# Altium PCB PCB1.PcbDoc
Units mm, origin at the board's own origin, x right, y up, seen from the top; angles counter-clockwise.
Board outline 150 x 82 mm, 2 copper layers (Top Layer, Bottom Layer); 127 components, 120 nets, 414 pads, 14 vias.
Unrouted connection lines stored in the file: 5.
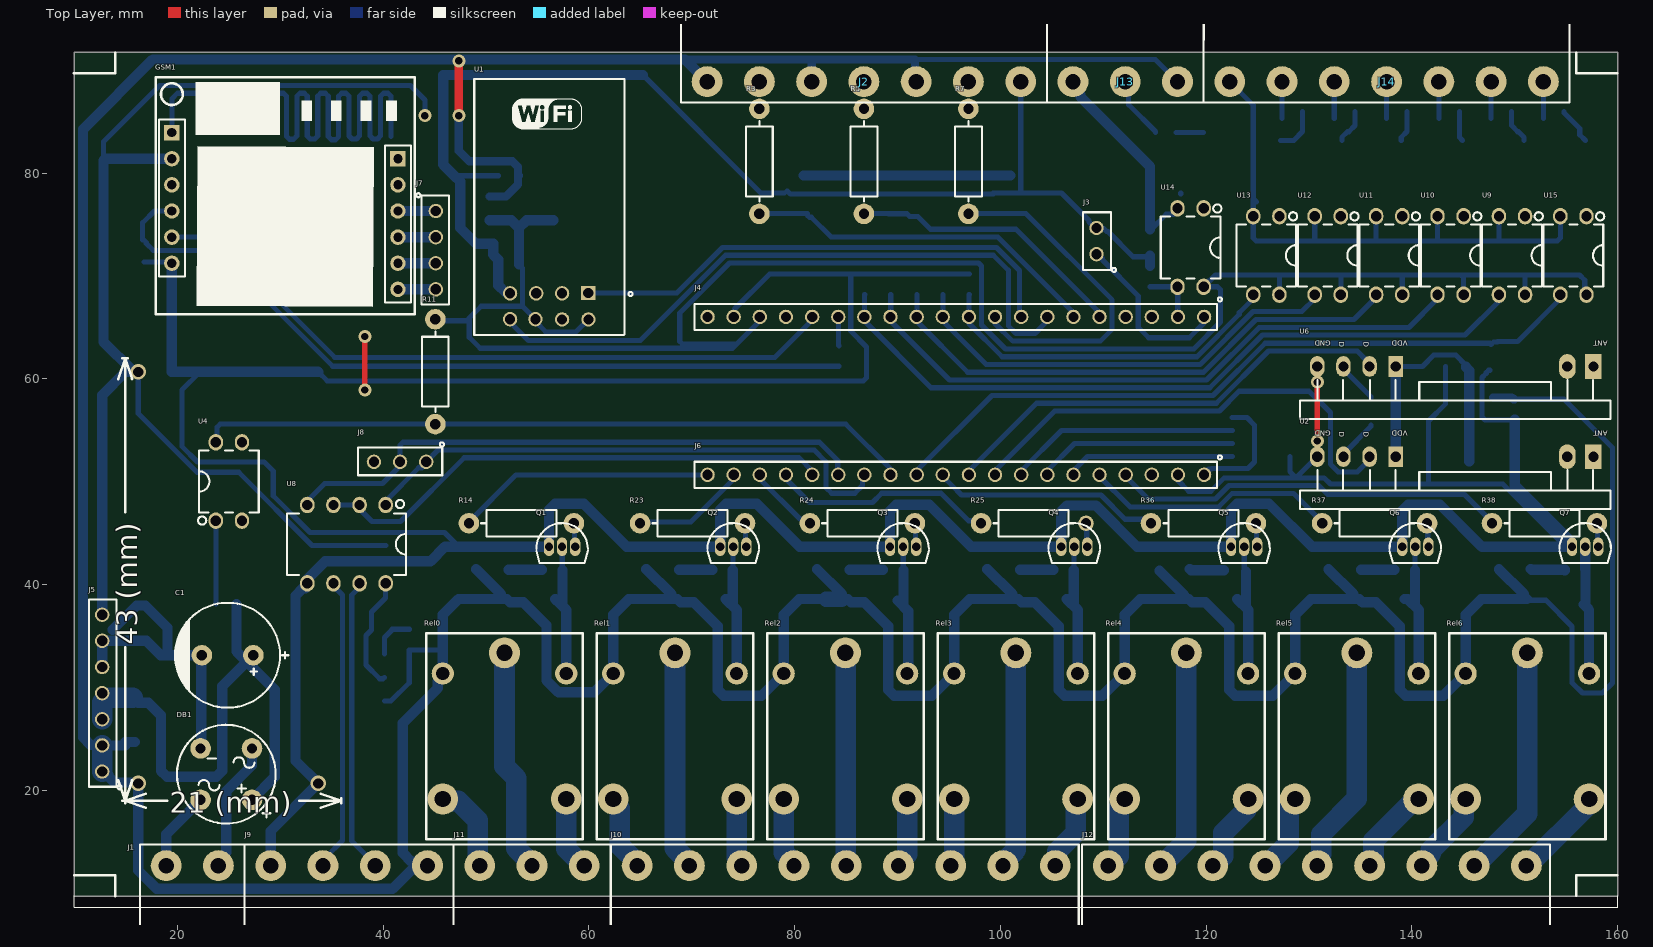
[diagram p0: Top Layer view]
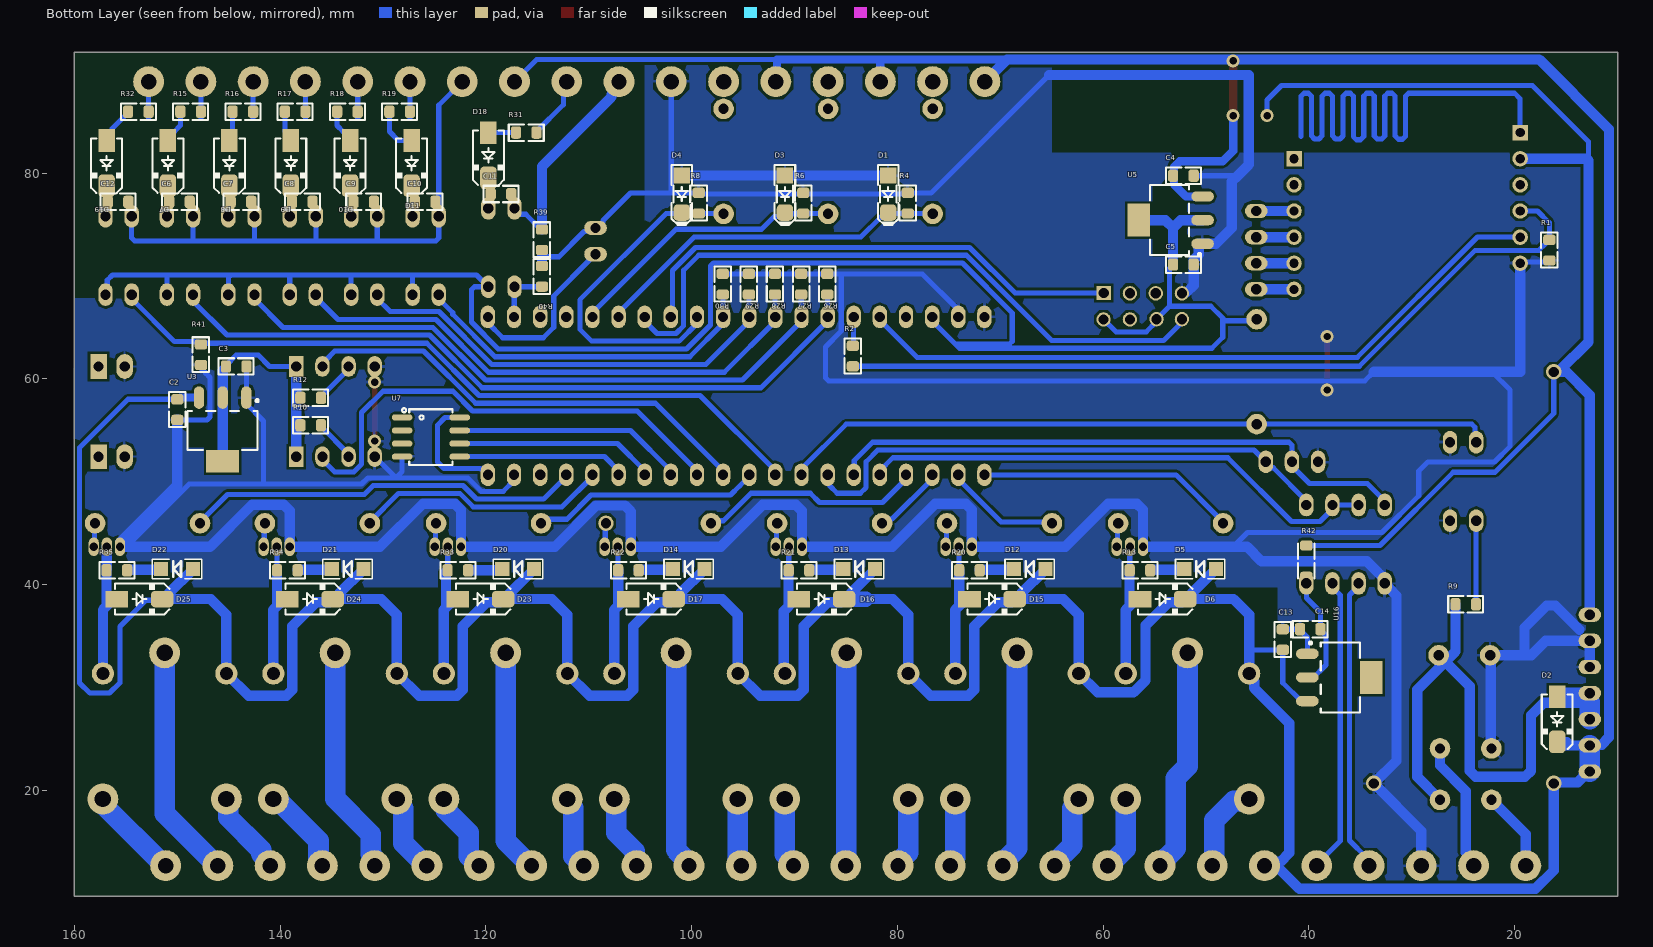
[diagram p1: Bottom Layer view, seen from below]

## Layer stack, top to bottom
Top Solder: solder mask 0.0102, Solder Resist, Dk 3.5
Top Layer: signal copper 0.0356
Dielectric 1: dielectric 0.32, FR-4, Dk 4.8
Bottom Layer: signal copper 0.0356
Bottom Solder: solder mask 0.0102, Solder Resist, Dk 3.5

## Board outline
10,9.744 160,9.744 160,91.744 10,91.744

## Design rules (kind name [scope] priority, off if disabled: settings)
Clearance [All] p1: gap=0.254 ignorepadtopadclearanceinfootprint=FALSE except(0: Arc-Hole Track-Hole SMDPad-Hole THPad-Hole Via-Hole Fill-Hole Poly-Hole Region-Hole Text-Hole)
DiffPairsRouting [All] p1: maxlimit=1 minlimit=0.4 mostfreqgap=0.4 toplayer_minwidth=0.4 toplayer_maxwidth=2 toplayer_prefwidth=0.4 bottomlayer_minwidth=0.4 bottomlayer_maxwidth=2 bottomlayer_prefwidth=0.4 maxuncoupledlength=12.7
PolygonConnect [All] p1: connectstyle=Relief reliefconductorwidth=0.254 reliefentries=4 polygonreliefangle="90 Angle" airgapwidth=0.254
RoutingVias [All] p1: holewidth=0.711 width=1.27 viastyle="Through Hole" minholewidth=0.711 minwidth=1.27 maxholewidth=0.711 maxwidth=1.27
SolderMaskExpansion [All] p1: expansion=0.102 istentingtop=FALSE
Width [All] p1: maxlimit=2 minlimit=0.3 preferedwidth=0.5
29 further rules are at their usual default settings.

## Components (designator, comment, footprint, x,y, rotation, side; value= is the part's Value field where it differs from the comment)
C1 "470uF" C_EL_10X16 24.892,33.147 r180 top
C2 "22uF" C0805 149.987,57.023 r90 bottom
C3 "22uF" C0805 144.272,61.214 r0 bottom
C4 "22uF" C0805 52.208,79.756 r0 bottom
C5 "22uF" C0805 52.208,71.12 r0 bottom
C6 "22uF" C0805 149.783,77.216 r180 bottom
C7 "22uF" C0805 143.814,77.216 r180 bottom
C8 "22uF" C0805 137.845,77.216 r180 bottom
C9 "22uF" C0805 131.876,77.216 r180 bottom
C10 "22uF" C0805 125.907,77.216 r180 bottom
C11 "22uF" C0805 118.541,77.978 r180 bottom
C12 "22uF" C0805 155.752,77.216 r180 bottom
C13 "22uF" C0805 42.545,34.671 r270 bottom
C14 "22uF" C0805 39.878,35.687 r180 bottom
D1 "Z3.0" D_SOD80 80.899,77.978 r270 bottom
D2 "1N4007" D_SMA 15.875,26.924 r270 bottom
D3 "Z3.0" D_SOD80 90.932,77.978 r270 bottom
D4 "Z3.0" D_SOD80 100.965,77.978 r270 bottom
D5 "" "0805 LED" 50.571,41.529 r0 bottom
D6 "1N4007" D_SMA 54.229,38.608 r180 bottom
D7 "1N4007" D_SMA 150.903,80.985 r270 bottom
D8 "1N4007" D_SMA 144.934,80.985 r270 bottom
D9 "1N4007" D_SMA 138.965,80.985 r270 bottom
D10 "1N4007" D_SMA 133.196,80.985 r270 bottom
D11 "1N4007" D_SMA 127.227,80.985 r270 bottom
D12 "" "0805 LED" 67.145,41.529 r0 bottom
D13 "" "0805 LED" 83.718,41.529 r0 bottom
D14 "" "0805 LED" 100.292,41.529 r0 bottom
D15 "1N4007" D_SMA 70.802,38.608 r180 bottom
D16 "1N4007" D_SMA 87.376,38.608 r180 bottom
D17 "1N4007" D_SMA 103.95,38.608 r180 bottom
D18 "1N4007" D_SMA 119.761,81.747 r270 bottom
D19 "1N4007" D_SMA 156.872,80.985 r270 bottom
D20 "" "0805 LED" 116.865,41.529 r0 bottom
D21 "" "0805 LED" 133.439,41.529 r0 bottom
D22 "" "0805 LED" 150.012,41.529 r0 bottom
D23 "1N4007" D_SMA 120.523,38.608 r180 bottom
D24 "1N4007" D_SMA 137.096,38.608 r180 bottom
D25 "1N4007" D_SMA 153.67,38.608 r180 bottom
DB1 "BR-WOB" DBRG_C10 24.765,21.59 r180 top
GSM1 "Sim800L" Sim800L 17.876,89.052 r0 top
J1 "CONN_TB2" MSTB_2 21.463,12.7 r180 top
J2 "CONN_TB7" MSTB_7 86.741,88.9 r0 top
J3 "HDRF2" HDR_F_1X2 109.347,73.406 r90 top
J4 "HDRF20" HDR_F_1X20 95.676,66.032 r180 top
J5 "HDRF7" HDR_F_1X7 12.7,29.464 r90 top
J6 "HDRF20" HDR_F_1X20 95.676,50.682 r180 top
J7 "HDRF4" HDR_F_1X4 45.13,72.517 r270 top
J8 "HDRF3" HDR_F_1X3 41.656,51.943 r180 top
J9 "CONN_TB4" MSTB_4 36.703,12.7 r180 top
J10 "CONN_TB9" MSTB_9 85.023,12.7 r180 top
J11 "CONN_TB3" MSTB_3 54.483,12.7 r180 top
J12 "CONN_TB9" MSTB_9 130.81,12.7 r180 top
J13 "CONN_TB3" MSTB_3 112.141,88.9 r0 top
J14 "CONN_TB7" MSTB_7 137.541,88.9 r0 top
Q1 "C945" TO92_3 57.404,43.688 r0 top
Q2 "C945" TO92_3 74.041,43.688 r0 top
Q3 "C945" TO92_3 90.551,43.688 r0 top
Q4 "C945" TO92_3 107.188,43.688 r0 top
Q5 "C945" TO92_3 123.698,43.688 r0 top
Q6 "C945" TO92_3 140.335,43.688 r0 top
Q7 "C945" TO92_3 156.845,43.688 r0 top
R1 "1K" R0805#1 16.637,72.524 r270 bottom
R2 "1K" R0805#1 84.328,62.23 r270 bottom
R3 "1K" R025W_AX04#1 76.581,81.153 r270 top
R4 "500" R0805#1 78.994,77.089 r90 bottom
R5 "1K" R025W_AX04#1 86.741,81.153 r270 top
R6 "500" R0805#1 89.154,77.089 r90 bottom
R7 "1K" R025W_AX04#1 96.901,81.153 r270 top
R8 "500" R0805#1 99.314,77.089 r90 bottom
R9 "30K" R0805#1 24.765,38.1 r180 bottom
R10 "Jumper" R0805#1 137.033,55.499 r0 bottom
R11 "1K" R025W_AX04#1 45.084,60.706 r90 top
R12 "Jumper" R0805#1 137.033,58.166 r0 bottom
R13 "2.2K" R0805#1 56.429,41.402 r180 bottom
R14 "1K" R025W_AX04#1 53.447,45.974 r0 top
R15 "30K" R0805#1 148.701,85.979 r0 bottom
R16 "30K" R0805#1 143.621,85.979 r0 bottom
R17 "30K" R0805#1 138.541,85.979 r0 bottom
R18 "30K" R0805#1 133.461,85.979 r0 bottom
R19 "30K" R0805#1 128.381,85.979 r0 bottom
R20 "2.2K" R0805#1 73.003,41.4 r180 bottom
R21 "2.2K" R0805#1 89.576,41.4 r180 bottom
R22 "2.2K" R0805#1 106.15,41.4 r180 bottom
R23 "1K" R025W_AX04#1 70.084,45.974 r0 top
R24 "1K" R025W_AX04#1 86.594,45.974 r0 top
R25 "1K" R025W_AX04#2 103.231,45.974 r0 top
R26 "1K" R0805#1 86.823,69.215 r270 bottom
R27 "1K" R0805#1 89.363,69.215 r270 bottom
R28 "1K" R0805#1 91.903,69.215 r270 bottom
R29 "1K" R0805#1 94.443,69.215 r270 bottom
R30 "1K" R0805#1 96.983,69.215 r270 bottom
R31 "30K" R0805#1 116.078,83.947 r0 bottom
R32 "30K" R0805#1 153.781,85.979 r0 bottom
R33 "2.2K" R0805#1 122.723,41.4 r180 bottom
R34 "2.2K" R0805#1 139.297,41.4 r180 bottom
R35 "2.2K" R0805#1 155.87,41.4 r180 bottom
R36 "1K" R025W_AX04#1 119.741,45.974 r0 top
R37 "1K" R025W_AX04#1 136.378,45.974 r0 top
R38 "1K" R025W_AX04#1 152.888,45.974 r0 top
R39 "Jumper" R0805#1 114.554,73.533 r270 bottom
R40 "1K" R0805#1 114.554,69.977 r270 bottom
R41 "1K" R0805#1 147.701,62.357 r90 bottom
R42 "Jumper" R0805#2 40.259,42.291 r90 bottom
Rel0 "RelayGH-1C-12L" GH-1C-12L 51.808,25.273 r90 top
Rel1 "RelayGH-1C-12L" GH-1C-12L 68.378,25.273 r90 top
Rel2 "RelayGH-1C-12L" GH-1C-12L 84.947,25.273 r90 top
Rel3 "RelayGH-1C-12L" GH-1C-12L 101.517,25.273 r90 top
Rel4 "RelayGH-1C-12L" GH-1C-12L 118.087,25.273 r90 top
Rel5 "RelayGH-1C-12L" GH-1C-12L 134.656,25.273 r90 top
Rel6 "RelayGH-1C-12L" GH-1C-12L 151.226,25.273 r90 top
U1 "ESP-01" ESP8266_ESP01 56.159,67.069 r0 top
U2 "RXB-22 433MHZ" RF_ETRXB 134.62,52.451 r180 top
U3 "LD1117-5" SOT223_4 145.586,54.991 r270 bottom
U4 "PC817" DIP_4 25.019,50.038 r90 top
U5 "LD1117-5" SOT223_4 53.54,75.438 r0 bottom
U6 "RXB-22 433MHZ" RF_ETRXB 134.62,61.214 r180 top
U7 "CAT24C256" SO_8 125.349,54.356 r180 bottom
U8 "MAX485" DIP_8 36.449,43.942 r270 top
U9 "PC817" DIP_4 149.733,72.009 r270 top
U10 "PC817" DIP_4 143.764,72.009 r270 top
U11 "PC817" DIP_4 137.795,72.009 r270 top
U12 "PC817" DIP_4 131.826,72.009 r270 top
U13 "PC817" DIP_4 125.857,72.009 r270 top
U14 "PC817" DIP_4 118.491,72.771 r270 top
U15 "PC817" DIP_4 155.702,72.009 r270 top
U16 "LD1117-5" SOT223_4 36.957,30.988 r180 bottom

## Footprints (in the part's own frame and the unit in brackets; to place one, negate y for a bottom-side part, rotate by r counter-clockwise, add the part's x,y. Pads: shape width x height; smd on the part's side, far side on the other; paste and mask are expansions set on the pad)
"0805 LED" [mil]
  rect 54x55 smd: 1(-61,0) 2(61,0)
  silkscreen extent -94,-37 95,37, body extent -40,-25 40,25, height 43
C0805 [mm] "CHIP Capacitor, 2.0X1.3mm, 0805"
  rrect50% 1x1.2 smd paste-0.1 mask+0.075: 1(-1,0) 2(1,0)
  Top Layer pour cut-out: -0.5,0.8 0.5,0.8 0.5,-0.8 -0.5,-0.8
  silkscreen extent -1.7,-0.8 1.7,0.8, body extent -1,-0.63 1,0.63, height 1
C_EL_10X16 [mm] "Capacitor Electrolythic, D10.0X16.0H pitch: 5.0mm"
  round 2 hole 1: 1(-2.5,0) 2(2.5,0)
  silkscreen extent -5.9,-5.1 5.1,5.1, body extent -5,-5 5,5, height 16
D_SMA [mm] "SMA Molded Diode, 2-Leads, Body 4.3x2.7mm, SOD-128"
  rect 2.2x1.6 smd paste-0.1: 1(-2.2,0)
  rrect50% 2.2x1.6 smd paste-0.1: 2(2.2,0)
  silkscreen extent -2.4,-1.5 2.9,1.5, body extent -2.75,-1.4 2.75,1.4, height 2.6
D_SOD80 [mm] "SOD-80 MINI-MELF 3.6X1.6mm, LL-34, LL4148"
  rect 1.6x1.6 smd paste-0.1: 1(-1.8,0)
  rrect50% 1.6x1.6 smd paste-0.1: 2(1.8,0)
  Top Layer pour cut-out: -1.016,1.016 1.016,1.016 1.016,-1.016 -1.016,-1.016
  silkscreen extent -2.8,-1 3,1, body extent -1.85,-0.79 1.85,0.79, height 2
DBRG_C10 [mm] "BRDIGE RECTIFIER, WOB WOG, pitch: 5.08mm, 10X10mm"
  round 2 hole 1: 1(-2.5,2.5) 2(-2.5,-2.5) 3(2.5,-2.5) 4(2.5,2.5)
  silkscreen extent -4.8,-4.8 4.8,4.8, body extent -4.65,-4.64 4.65,4.64, height 5.6
DIP_4 [mm] "BRIDGE DIODE, DIP, pitch 2.54mm, 300mil Width"
  oval 1.6x1.4 / inner round 1.4 / far side oval 2.2x1.4 hole 1: 1(-3.81,1.27) 2(-3.81,-1.27) 3(3.81,-1.27) 4(3.81,1.27)
  silkscreen extent -4.2,-2.9 3,3, body extent -4,-2.77 4,2.77, height 4.31
DIP_8 [mm] "DIP, pitch 2.54mm, 300mil Width"
  oval 1.6x1.4 / inner round 1.4 / far side oval 2.2x1.4 hole 1: 1(-3.81,3.81) 2(-3.81,1.27) 3(-3.81,-1.27) 4(-3.81,-3.81) 5(3.81,-3.81) 6(3.81,-1.27) 7(3.81,1.27) 8(3.81,3.81)
  silkscreen extent -4.3,-5.8 3,5.8, body extent -3.94,-5.7 3.94,5.73, height 4.19
ESP8266_ESP01 [mm] "ESP8266 ESP-01 Wi07C"
  rect 1.4x1.4 hole 1: 1(3.785,1.283)
  round 1.4 hole 1: 2(3.81,-1.283) 3(1.245,1.257) 4(1.245,-1.283) 5(-1.27,1.257) 6(-1.346,-1.257) 7(-3.81,1.257) 8(-3.81,-1.257)
  silkscreen extent -7.29,-2.78 8.1,22.09, body extent -7.26,-2.76 7.24,22.04
GH-1C-12L [mm]
  round 3 hole 1.6: 1(8.1,0) 3(-6.1,6) 4(-6.1,-6)
  round 2.159 hole 1.27: 2(6.1,6) 5(6.1,-6)
  silkscreen extent -10,-7.6 10,7.6, body extent -9.71,-7.98 9.79,7.92, height 15
HDR_F_1X2 [mm] "HEADER FEMALE pitch: 2.54mm"
  round 1.4 / inner round 1.4 / far side oval 1.4x2.2 hole 1 mask+0.1: 1(-1.27,0) 2(1.27,0)
  silkscreen extent -3,-1.9 2.8,1.3, body extent -2.66,-1.3 2.67,1.2, height 8.5
HDR_F_1X3 [mm] "HEADER FEMALE pitch: 2.54mm"
  round 1.4 / inner round 1.4 / far side oval 1.4x2.2 hole 1 mask+0.1: 1(-2.54,0) 2(0,0) 3(2.54,0)
  silkscreen extent -4.27,-1.9 4.1,1.3, body extent -3.93,-1.3 3.94,1.2, height 8.5
HDR_F_1X4 [mm] "HEADER FEMALE pitch: 2.54mm"
  round 1.4 / inner round 1.4 / far side oval 1.4x2.2 hole 1 mask+0.1: 1(-3.81,0) 2(-1.27,0) 3(1.27,0) 4(3.81,0)
  silkscreen extent -5.54,-1.9 5.3,1.3, body extent -5.2,-1.3 5.21,1.2, height 8.5
HDR_F_1X7 [mm] "HEADER FEMALE pitch: 2.54mm"
  round 1.4 / inner round 1.4 / far side oval 1.4x2.2 hole 1 mask+0.1: 1(-7.62,0) 2(-5.08,0) 3(-2.54,0) 4(0,0) 5(2.54,0) 6(5.08,0) 7(7.62,0)
  silkscreen extent -9.35,-1.9 9.1,1.3, body extent -9.01,-1.3 9.02,1.2, height 8.5
HDR_F_1X20 [mm] "Connector; Header; 20 Position"
  round 1.4 / inner round 1.4 / far side oval 1.4x2.2 hole 1: 1(-24.13,0) 2(-21.59,0) 3(-19.05,0) 4(-16.51,0) 5(-13.97,0) 6(-11.43,0) 7(-8.89,0) 8(-6.35,0) 9(-3.81,0) 10(-1.27,0) 11(1.27,0) 12(3.81,0) 13(6.35,0) 14(8.89,0) 15(11.43,0) 16(13.97,0) 17(16.51,0) 18(19.05,0) 19(21.59,0) 20(24.13,0)
  silkscreen extent -25.86,-1.9 25.4,1.27, body extent -25.4,-1.27 25.4,1.27, height 8.5
MSTB_2 [mm] "PHOENIX MSTB 2, 5-G, 5.08mm pitch, 2pin"
  round 3 hole 1.5: 1(-2.54,0) 2(2.54,0)
  silkscreen extent -5.08,-2.03 5.08,10.1, body extent -5,-2 5,10, height 8.7
MSTB_3 [mm] "PHOENIX MSTB 2, 5-G, 5.08mm pitch, 3pin"
  round 3 hole 1.5: 1(-5.08,0) 2(0,0) 3(5.08,0)
  silkscreen extent -7.62,-2.03 7.62,10.1, body extent -7.5,-2 7.5,10, height 8.6
MSTB_4 [mm] "PHOENIX MSTB 2, 5-G, 5.08mm pitch"
  round 3 hole 1.5: 1(-7.62,0) 2(-2.54,0) 3(2.54,0) 4(7.62,0)
  silkscreen extent -10.16,-2.03 10.16,10.1, body extent -10,-2 10,10, height 8.6
MSTB_7 [mm] "PHOENIX MSTB 2, 5-G, 5.08mm pitch"
  round 3 hole 1.5: 1(-15.24,0) 2(-10.16,0) 3(-5.08,0) 4(0,0) 5(5.08,0) 6(10.16,0) 7(15.24,0)
  silkscreen extent -17.78,-2.03 17.78,10.1, body extent -17.5,-2 17.5,10, height 8.6
MSTB_9 [mm] "PHOENIX MSTB 2, 5-G, 5.08mm pitch"
  round 3 hole 1.5: 1(-20.32,0) 2(-15.24,0) 3(-10.16,0) 4(-5.08,0) 5(0,0) 6(5.08,0) 7(10.16,0) 8(15.24,0) 9(20.32,0)
  silkscreen extent -22.6,-2.03 22.86,10.1, body extent -22.5,-2 22.5,10, height 8.6
R025W_AX04#1 [mm] "RESISTOR 1/4 WATT, AXIAL0.4"
  round 2 hole 1: 1(-5.1,0) 2(5.1,0)
  silkscreen extent -3.9,-1.3 3.9,1.3, body extent -5.38,-1.29 5.38,1.29, height 2.6
R025W_AX04#2 [mm] "RESISTOR 1/4 WATT, AXIAL0.4"
  round 2 hole 1: 1(-5.1,0)
  round 1.5 hole 1: 2(5.1,0)
  silkscreen extent -3.9,-1.3 3.9,1.3, body extent -5.38,-1.28 5.38,1.28, height 2.6
R0805#1 [mm] "CHIP RESISTOR 1/8 WATT ,2.0X1.3mm, 0805, 2012"
  rrect50% 1x1.2 smd paste-0.1 mask+0.075: 1(-1,0) 2(1,0)
  Top Layer pour cut-out: -0.5,0.8 0.5,0.8 0.5,-0.8 -0.5,-0.8
  silkscreen extent -1.7,-0.8 1.7,0.8, body extent -1.15,-0.67 1.15,0.67, height 0.76
R0805#2 [mm] "CHIP RESISTOR 1/8 WATT ,2.0X1.3mm, 0805, 2012"
  rrect50% 1x1.2 smd paste-0.1 mask+0.075: 1(-1.524,0) 2(1.524,0)
  Top Layer pour cut-out: -0.5,0.8 0.5,0.8 0.5,-0.8 -0.5,-0.8
  silkscreen extent -1.7,-0.8 1.7,0.8, body extent -1.15,-0.67 1.15,0.67, height 0.76
RF_ETRXB [mm] "Module RF, Receiver, ET-RXB-12, ET-RXB-22"
  rect 1.6x2.4 hole 1: 1(-23.03,0)
  oval 1.6x2.4 hole 1: 2(-20.49,0)
  rect 1.4x2 hole 1: 3(-3.81,0)
  oval 1.4x2 hole 1: 4(-1.27,0) 5(1.27,0) 6(3.81,0)
  silkscreen extent -24.7,1.3 5.5,5.1, body extent -24.6,-2.05 5.4,6.4, height 14.5
Sim800L [mm]
  rect 1.5x1.5 hole 0.9: 1(1.6,-5.105) 7(23.571,-7.645)
  round 1.5 hole 0.9: 2(1.6,-7.645) 3(1.6,-10.185) 4(1.6,-12.725) 5(1.6,-15.265) 6(1.6,-17.805) 8(23.571,-10.185) 9(23.571,-12.725) 10(23.571,-15.265) 11(23.571,-17.805) 12(23.571,-20.345)
  silkscreen extent 0.03,-22.76 25.22,0.28, body extent 0.12,-23 25.12,0.14, height 10.1
SO_8 [mm] "SOP-8, 5x3.9mm body 1.27mm pitch, SOT96-1, M08A, S8, SOIC8, VO8, MS-012AA(JEDEC), R-8, 8S2, VOG8"
  oval 2x0.6 smd: 1(-2.8,1.905) 2(-2.8,0.635) 3(-2.8,-0.635) 4(-2.8,-1.905) 5(2.8,-1.905) 6(2.8,-0.635) 7(2.8,0.635) 8(2.8,1.905)
  silkscreen extent -2.8,-2.7 2.1,2.8, body extent -3,-2.45 3,2.45, height 1.7
SOT223_4 [mm] "SOT223, 4-Leads, Body 6.5x3.5mm, Pitch 2.30mm"
  oval 2.2x1 smd: 1(-3.2,2.3) 2(-3.2,0) 3(-3.2,-2.3)
  rect 2.2x3.2 smd paste-5: 4(3,0)
  Top Layer pour cut-out: -1.7,3.556 1.7,3.556 1.7,-3.556 -1.7,-3.556
  silkscreen extent -3.02,-3.4 1.9,3.47, body extent -3.5,-3.25 3.5,3.25, height 1.7
TO92_3 [mm] "TO-92, SOT54"
  oval 1x1.8 hole 0.8 mask+0.1: 1(-1.27,0) 2(0,0) 3(1.27,0)
  silkscreen extent -2.5,-1.59 2.5,2.3, body extent -2.38,-1.45 2.38,2.18, height 7.82

## Part data
C1: library part CAP_THD_EL_470uF_35v, "CAP, THD, ELEC,", ASSEMBLY=ASSEMBLY, DESC=DESCRIPTION, DIST#=MOUSER, MANF=MANF, MANF_P#=MANF_PART#, PARAM=20%, PARAM2=35v, Price="10= -$"
C2 C3 C4 C5 C6 C7 C8 C9 C10 C11 C12 C13 C14: library part CAP_SMD_MLCC_10u25V, "CAP, MLCC, X5R 10uF 10% 25V 0805", MANF="Taiyo Yuden", MANF_P#=TMK212BBJ106MG, PARAM="X5R, 10%", PARAM2=25V, Price=100=6$
D1 D3 D4: library part DIODE_SMD_1N4148_SOD80, "DIODE, FAST SWTICHING, 0.3A, 0.5W", ASSEMBLY=ASSEMBLY, DESC=DESCRIPTION, MANF=MANF, MANF_P#=1N4148, PARAM=75V, PARAM2="300mA, 0.5W", Price=PRICE
D2 D6 D7 D8 D9 D10 D11 D15 D16 D17 D18 D19 D23 D24 D25: library part DIODE_SMD_1N4007, "DIODE, GENERAL PURPOSE, 1000V/1A", ASSEMBLY=ASSEMBLY, DESC=DESCRIPTION, MANF=Kingtronics, MANF_P#=M7, PARAM="1000V VRRM", PARAM2=1A, Price=PRICE
D5 D12 D13 D14 D20 D21 D22: library part LED, "Led", LatestRevisionDate=08-Jul-2005, LatestRevisionNote="Mech Layer 1 removed.", PackageReference=LED-0, Published=8-Jun-2000, Publisher="Altium Limited"
DB1: library part DIODE_THD_BRIDGE_WO, "DIODE, BRIDGE,"
J1: library part CONN_MSTB_2, "CONN, PHOENIX MSTB, 5-G, 5.08mm pitch", PARAM=12A, PARAM2=320V
J2 J14: library part CONN_MSTB_7, "CONN, PHOENIX MSTB, 5-G, 5.08mm pitch", PARAM=12A, PARAM2=320V
J3: library part HDR_F_1X2, "CONN, HEADER, Female, pitch: 2.54mm, 2POS"
J4 J6: library part HDR_F_1X20, "CONN, HEADER, Female, pitch: 2.54mm, 20POS"
J5: library part HDR_F_1X7, "CONN, HEADER, Female, pitch: 2.54mm, 7POS"
J7: library part HDR_F_1X4, "CONN, HEADER, Female, pitch: 2.54mm, 4POS"
J8: library part HDR_F_1X3, "CONN, HEADER, Female, pitch: 2.54mm, 3POS"
J9: library part CONN_MSTB_4, "CONN, PHOENIX MSTB, 5-G, 5.08mm pitch", PARAM=12A, PARAM2=320V
J10 J12: library part CONN_MSTB_9, "CONN, PHOENIX MSTB, 5-G, 5.08mm pitch", PARAM=12A, PARAM2=320V
J11 J13: library part CONN_MSTB_3, "CONN, PHOENIX MSTB, 5-G, 5.08mm pitch", PARAM=12A, PARAM2=320V
Q1 Q2 Q3 Q4 Q5 Q6 Q7: library part NPN_C945_TO92, "BJT, NPN, 50v, 0.15A, THD, TO92, BC945", MANF=-, MANF_P#="C945, 2SC945, BC945", PARAM="50v, 0.15A", PARAM2=250mW
R1 R2 R4 R6 R8 R10 R12 R19 R42: library part RES_SMD_0805, "RESISTOR, SMD", ASSEMBLY=ASSEMBLY, DESC=DESCRIPTION, DIST#=MOUSER, MANF=-, MANF_P#=-, PARAM=-W, PARAM2=1%, Price="100= 0.5$"
R3 R5 R7 R11 R14 R23 R24 R25 R36 R37 R38: library part RES_THD, "RESISTOR, THD", ASSEMBLY=ASSEMBLY, DESC=DESCRIPTION, DIST#=MOUSER, MANF="KOA SPEER", MANF_P#=RK73H1ETTP4701F, PARAM=0.063W, PARAM2=1%, Price="100= 0.5$"
R9 R13 R15 R16 R17 R18 R20 R21 R22 R26 R27 R28 R29 R30 R31 R32 R33 R34 R35 R39 R40 R41: library part RES_SMD, "RESISTOR, SMD", ASSEMBLY=ASSEMBLY, DESC=DESCRIPTION, DIST#=MOUSER, MANF=-, MANF_P#=-, PARAM=-W, PARAM2=1%, Price="100= 0.5$"
Rel0 Rel1 Rel2 Rel3 Rel4 Rel5 Rel6: "HJR-3FF-12VDC-S-Z"
U1: library part ESP8266_ESP-01, "ESP8266 ESP-01 WiFi Module", MANF_P#=ESP-01
U2 U6: library part ET-RXB-22, "Modules RF 433MHz", MANF=www.eeant.com, MANF_P#=ET-RXB-22, PARAM="433MHz, 2.4Kbps, -30~85oC", PARAM2=3.3~5.5VCC, Price=7t@ECA
U3 U5 U16: library part VREG_1117_SOT223, "REG, Linear, LDO1V, 0.8A, SOT-223", MANF="TI, ON, ST", MANF_P#="LD1117, LM1117, AMS1117, TLV1117, REG1117, NCP1117, LT1117, SPX1117", PARAM="LDO1V, 0.8A", PARAM2=1.2/1.5/1.8/2.5/2.85/3.3/5V
U4 U9 U10 U11 U12 U13 U14 U15: library part OPTC_TR4P_PC817, "OPTOCOUPLER, TRANSISTOR, 4PIN", MANF=SHARP, MANF_P#=PC817, PARAM=IF=20mA, PARAM2="VCE = 35V", Price=-
U7: library part EEPROM_I2C_CAT24C256_SOP8, "EEPROM, I2C, 256Kb,  SOP-8", MANF=ON, MANF_P#=CAT24C256W
U8: library part MAX485_DIP8, "RS-485 Transceiver, 5V, DIP-8, ±7V Ground Difference Between Devices on the Bus", MANF="Maxim Integrated", MANF_P#=MAX485EPA, Price=700toman@PAYA

## Via types
v1: diameter 1.27, hole 0.711, Top Layer to Bottom Layer, 7 vias
v2: diameter 1.5, hole 1, Top Layer to Bottom Layer, 7 vias

## Nets (pads, with @x,y where several pads share a name; then routed paths per layer and width w, separated by ;. In a path a pad name is that pad's centre, name@x,y a point inside that pad or via, vN(x,y) a via of type N, cw(c..) or ccw(c..) an arc to the next point about the centre after c; other vN are vias at no path point)
3.3V: C5.2 J4.18 J6.1 R11.2 U1.2 U1.6 U5.2 U5.4 U7.8 U9.4 U10.4 U11.4 U12.4 U13.4 U14.4 U15.4 | length 199.7
  Bottom Layer w0.5: R11.2 45.231,65.659 48.387,65.659 ; C5.2@53.553,70.775 53.553,67.071 ; U1.2 58.765,64.582 55.814,64.582 54.813,65.583 U1.6 53.553,67.071 ; J4.18 76.626,65.632 74.367,63.373 ; J6.1 119.806,50.838 120.222,51.254 120.495,51.254 120.549,51.308 124.079,51.308 124.714,51.943 124.714,55.499 123.97,56.243 122.567,56.243 U7.8 ; U13.4 127.127,69.977 127,70.104 ; U12.4 133.096,68.453 133.223,68.58 133.096,68.707 133.096,70.104 ; U11.4 139.065,70.104 ; U10.4 145.034,69.85 144.78,70.104 ; U9.4 151.003,69.977 151.13,70.104 ; U15.4 156.8,68.371 156.8,69.602 156.298,70.104 151.13,70.104 ; 48.387,65.659 48.387,65.913 49.545,67.071 53.553,67.071 ; 48.387,65.659 48.387,64.047 49.45,62.984 73.978,62.984 74.367,63.373 ; 74.367,63.373 69.127,63.373 68.834,63.666 68.834,66.421 73.684,71.271 97.878,71.271 98.171,70.978 98.171,65.244 100.495,62.92 118.8,62.92 121.412,65.532 121.412,68.668 121.119,68.961 U14.4 119.761,69.117 120.177,69.533 120.333,69.533 120.904,70.104 127,70.104 ; 127,70.104 133.096,70.104 ; 133.096,70.104 139.065,70.104 ; 139.065,70.104 144.78,70.104 ; 144.78,70.104 151.13,70.104
  Bottom Layer w1: U5.2 52.451,75.438 53.208,74.681 ; C5.2 53.208,74.681 ; U5.4 53.966,75.438 53.208,74.681
4.2V: GSM1.2 J5.7 R42.2 | length 125.6
  Bottom Layer w0.5: 12.827,81.233 12.827,83.058 18.3,88.531 42.66,88.531 44.069,87.122 v1(44.069,85.598) ; v2(16.208,60.686) 16.208,56.64 21.921,50.927 25.985,50.927 33.097,43.815 33.528,43.815 R42.2
  Bottom Layer w1: J5.7 12.7,58.42 14.966,60.686 v2(16.208,60.686) 16.112,60.782 15.672,60.782 12.827,63.627 12.827,81.233 13.001,81.407 GSM1.2
5V: C3.2 R10.2 R12.2 U2.3 U3.2 U3.4 U6.3 | length 25.9
  Bottom Layer w0.5: U6.3 141.022,61.214 142.126,62.318 144.268,62.318 145.272,61.314 C3.2
  Bottom Layer w1: U2.3 138.43,55.499 138.43,58.166 U6.3 ; C3.2 145.272,61.114 145.586,60.8 U3.2 U3.4@145.586,52.001
5VRS485: C14.2 R42.1 U8.8 U16.2 U16.4 | length 11.1
  Bottom Layer w0.5: U16.2 40.132,30.988 40.005,30.861 39.684,30.861 38.354,32.191 38.354,35.063 38.878,35.587 38.878,37.354 40.232,38.708 40.232,40.105 U8.8
12V: C2.2 C4.2 C13.2 D2.2 D5.1 D6.2 D12.1 D13.1 D14.1 D15.2 D16.2 D17.2 D20.1 D21.1 D22.1 D23.2 D24.2 D25.2 J2.1 J2.3 J2.5 J5.1 J5.2 J9.1 J13.3 Rel0.2 Rel1.2 Rel2.2 Rel3.2 Rel4.2 Rel5.2 Rel6.2 U3.3 U5.3 U16.3 | length 553.9
  Top Layer w0.8: v1(47.371,85.598) v1(47.371,90.924)
  Bottom Layer w0.5: U16.3 40.757,28.688 42.545,30.476 C13.2 45.665,33.671 45.808,33.528 ; 91.694,91.054 115.067,91.054 J13.3 ; C2.2 154.791,58.023 159.492,53.322 159.492,30.46 158.496,29.464 156.591,29.464 155.575,30.48 155.575,35.941 153.027,38.489 151.589,38.489 D25.2 D25.2@151.17,38.608
  Bottom Layer w0.8: v1(47.371,85.598) 47.371,82.169 48.387,81.153 52.578,81.153 53.108,80.623 53.108,79.856 C4.2 ; U5.3 51.957,77.738 53.108,78.889 53.108,79.656 C4.2 ; C4.2@53.211,79.772 53.218,79.765 C4.2 ; 69.342,91.059 81.661,91.059 81.661,91.054 ; 81.534,91.054 81.661,91.054 ; J2.3 81.661,91.054 ; J2.5 91.694,89.027 91.694,91.054 81.661,91.054 ; U3.3 149.719,58.191 149.887,58.023 C2.2
  Bottom Layer w1: 11.555,24.461 10.846,25.17 10.846,84.27 17.635,91.059 47.371,91.059 69.342,91.059 J2.1 ; J5.1 12.992,21.844 13.3,21.536 13.3,21.367 13.886,20.782 16.112,20.782 v2(16.208,20.686) ; J5.2 14.945,24.384 ; 14.945,24.724 D2.2 ; v2@16.208,20.821 16.208,12.227 17.989,10.446 40.926,10.446 43.18,12.7 J9.1 43.94,13.083 42.764,13.083 41.91,13.936 41.91,26.543 45.323,29.956 45.323,30.574 45.808,31.059 Rel0.2 45.808,33.528 45.808,37.089 47.327,38.608 D6.2 52.048,38.608 52.348,38.308 53.632,38.308 55.88,36.06 55.88,30.708 57.049,29.54 60.544,29.54 Rel1.2 62.378,37.089 63.897,38.608 D15.2 68.618,38.608 68.918,38.308 70.202,38.308 72.533,35.977 72.533,29.796 73.118,29.21 76.784,29.21 Rel2.2 78.947,37.089 80.466,38.608 83.058,38.608 ; D5.1@49.041,41.516 D6.2@51.448,39.109 ; D12.1@65.596,41.516 D15.2@68.003,39.109 ; D13.1@82.181,41.516 D16.2@84.588,39.109 ; D16.2@84.582,38.608 D16.2 85.188,38.608 85.488,38.308 86.771,38.308 89.102,35.977 89.102,29.796 89.688,29.21 93.354,29.21 Rel3.2 95.517,37.089 97.036,38.608 D17.2 101.757,38.608 102.057,38.308 103.341,38.308 105.672,35.977 105.672,29.796 106.258,29.21 109.924,29.21 Rel4.2 112.087,37.089 113.605,38.608 D23.2 118.327,38.608 118.627,38.308 119.911,38.308 122.241,35.977 122.241,29.796 122.827,29.21 126.493,29.21 Rel5.2 128.656,37.089 130.175,38.608 D24.2 135.196,38.308 136.48,38.308 138.811,35.977 138.811,29.796 139.397,29.21 143.063,29.21 Rel6.2 145.226,37.089 146.745,38.608 151.17,38.608 150.87,38.908 150.87,39.109 148.463,41.516 D22.1 ; D14.1@98.742,41.516 D17.2@101.15,39.109 ; D20.1@115.47,41.366 D23.2@117.877,38.959 ; D21.1@131.889,41.516 D24.2@134.297,39.109
  Bottom Layer w1.5: 83.058,38.608 D16.2@84.582,38.608
  Bottom Layer w2: J5.1 J5.2
AC-IN1: DB1.2 J1.1 | length 12.7
  Bottom Layer w1: J1.1 24.003,13.241 24.765,14.003 24.765,19.939 27.265,22.439 DB1.2
AC-IN2: DB1.4 J1.2 | length 7.8
  Bottom Layer w1: J1.2 18.923,15.748 DB1.4
ADC01: D3.2 J4.5 R5.2 R6.1 | length 27.3
  Bottom Layer w0.5: R5.2 86.759,76.071 89.136,76.071 R6.1 ; R6.1@89.136,76.053 90.932,76.053 91.192,75.793 91.974,75.793 93.218,74.549 101.529,74.549 109.646,66.432 J4.5
ADC02: D1.2 J4.6 R3.2 R4.1 | length 35.2
  Bottom Layer w0.5: R3.2 76.599,76.071 R4.1@79.112,76.071 ; R4.1 81.264,76.089 81.264,75.894 81.438,75.721 81.632,75.721 83.566,73.787 99.751,73.787 107.106,66.432 J4.6
ANT: GSM1.1 | length 70.1
  Bottom Layer w0.5: GSM1.1 19.476,87.244 20.009,87.777 30.314,87.777 30.607,87.484 30.607,83.589 30.9,83.296 31.314,83.296 31.623,83.605 31.623,87.484 31.916,87.777 32.346,87.777 32.639,87.484 32.639,83.605 32.932,83.312 33.362,83.312 33.655,83.605 33.655,87.484 33.948,87.777 34.378,87.777 34.671,87.484 34.671,83.566 34.98,83.257 35.394,83.257 35.687,83.55 35.687,87.484 35.98,87.777 36.41,87.777 36.703,87.484 36.703,83.614 36.996,83.321 37.41,83.321 37.719,83.63 37.719,87.484 38.012,87.777 38.442,87.777 38.735,87.484 38.735,83.63 39.028,83.337 39.458,83.337 39.751,83.63 39.751,87.484 40.044,87.777 40.474,87.777 40.767,87.484 40.767,83.591
com-Rel0: J11.2 Rel0.1 | length 21.8
  Bottom Layer w2: Rel0.1 51.808,22.36 52.959,21.209 52.959,14.372 54.483,12.848 J11.2
com-Rel1: J10.8 Rel1.1 | length 21.3
  Bottom Layer w2: Rel1.1 68.378,14.372 69.783,12.966 J10.8
com-Rel2: J10.5 Rel2.1 | length 20.7
  Bottom Layer w2: Rel2.1 84.985,33.335 84.985,12.738 J10.5
com-Rel3: J10.2 Rel3.1 | length 21.2
  Bottom Layer w2: J10.2 100.263,12.971 101.517,14.225 Rel3.1
com-Rel4: J12.8 Rel4.1 | length 21.6
  Bottom Layer w2: J12.8@115.951,12.7 115.951,12.971 118.087,15.106 Rel4.1
com-Rel5: J12.5 Rel5.1 | length 22.3
  Bottom Layer w2: J12.5@131.191,12.7 131.001,12.89 131.001,13.598 131.191,13.788 131.191,15.748 134.656,19.213 Rel5.1
com-Rel6: J12.2 Rel6.1 | length 22.7
  Bottom Layer w2: J12.2@146.431,12.7 146.431,12.971 151.226,17.766 Rel6.1
GND: C1.2 C2.1 C3.1 C4.1 C5.1 C13.1 C14.1 D1.1 D3.1 D4.1 DB1.3 GSM1.6 J2.7 J3.2 J4.19 J4.20 J5.5 J5.6 J6.2 J8.3 J9.4 Q1.1 Q2.1 Q3.1 Q4.1 Q5.1 Q6.1 Q7.1 R1.2 R4.2 R6.2 R8.2 R26.1 R27.1 R28.1 R29.1 R30.1 R39.2 R40.1 R41.1 U1.7 U2.2 U2.6 U3.1 U4.2 U4.3 U5.1 U6.2 U6.6 U7.4 U8.5 U16.1 | length 609.4
  Top Layer w0.5: v1(38.227,58.928) 38.227,64.008 38.1,64.135 v1(38.227,64.135) ; v1(130.81,53.975) v1(130.81,59.69)
  Bottom Layer w0.5: R1.2@16.775,71.385 GSM1.6@19.338,71.385 ; 22.225,60.706 20.447,58.928 20.447,53.467 21.971,51.943 28.448,51.943 29.337,51.054 29.337,48.641 32.893,45.085 45.974,45.085 47.371,43.688 ; 33.708,60.686 34.577,59.817 86.702,59.817 86.995,60.11 86.995,63.119 85.455,64.659 85.455,70.215 ; U16.1 40.157,34.866 40.878,35.587 C14.1 40.886,35.679 42.537,35.679 C13.1 ; 46.932,79.756 C4.1 ; 65.278,89.535 76.724,78.089 R4.2 ; J4.19@74.168,66.802 77.581,70.215 85.455,70.215 ; R4.2@79.286,78.281 79.589,77.978 R8.2@99.314,77.978 ; R26.1 85.455,70.215 ; R26.1@86.995,70.215 R27.1 R28.1 R29.1 R30.1 ; R8.2 101.965,78.089 ; J2.7 101.981,78.105 101.965,78.089 ; J3.2@109.227,74.64 108.622,75.245 108.622,75.401 105.934,78.089 101.965,78.089 ; J3.2 109.991,74.676 110.335,74.332 110.453,74.332 112.903,71.882 114.554,71.882 ; J6.2 117.266,50.12 118.308,49.078 120.452,49.078 121.765,50.391 128.75,50.391 ; U7.4 128.149,50.992 128.75,50.391 ; U2.6 128.75,50.391 ; C3.1 143.279,61.207 143.279,58.198 U3.1 143.286,57.591 141.605,55.91 141.605,49.784 ; 147.574,60.849 147.474,60.849 147.224,60.599 147.224,60.549 146.812,60.137 146.812,56.316 147.105,56.023 C2.1 ; 154.94,43.688 148.844,49.784 141.605,49.784 ; 128.75,50.391 131.473,50.391 132.08,49.784 141.605,49.784
  Bottom Layer w1: J5.5 J5.6 17.005,34.544 18.402,33.147 19.05,33.147 ; 13.702,35.63 16.054,37.982 16.882,37.982 19.05,35.814 19.05,33.147 ; GSM1.6 19.476,60.706 22.225,60.706 33.688,60.706 33.708,60.686 ; C1.2@22.121,33.147 19.05,33.147 ; DB1.3 22.328,24.154 C1.2@22.328,33.084 ; J9.4 29.083,16.061 v2(33.708,20.686) 31.496,22.898 31.496,38.946 32.205,39.655 32.454,39.655 32.639,39.84 32.639,40.532 34.398,42.291 44.622,42.291 46.019,43.688 47.371,43.688 Q1.1 56.134,47.293 56.72,47.879 59.504,47.879 63.695,43.688 Q2.1 72.771,47.293 73.357,47.879 76.327,47.879 80.518,43.688 Q3.1@89.047,43.688 ; U1.7 52.273,68.403 51.902,68.403 51.208,69.097 C5.1 51.208,71.601 50.72,72.089 50.72,73.138 U5.1 49.036,73.138 47.498,74.676 47.498,79.19 46.932,79.756 45.847,80.841 45.847,89.535 65.278,89.535 ; D1.1 D3.1 D4.1 ; Q3.1@89.281,44.45 89.281,47.178 89.867,47.764 93.079,47.764 97.155,43.688 Q4.1 105.918,47.122 106.504,47.708 109.264,47.708 113.284,43.688 Q5.1 122.428,47.293 123.014,47.879 126.111,47.879 130.302,43.688 Q6.1 139.065,47.178 139.651,47.764 142.736,47.764 146.812,43.688 154.94,43.688 ; R40.1 114.554,71.882 114.554,72.009 ; C2.1 149.987,49.676 155.575,44.088 Q7.1
GPIO01: D4.2 J4.9 R7.2 R8.1 | length 33.5
  Bottom Layer w0.5: R7.2 96.919,76.071 99.296,76.071 R8.1 102.473,76.089 110.871,67.691 110.871,64.825 109.72,63.674 101.215,63.674 99.486,65.403 J4.9
I2c-SCL-EEPROM: J6.7 U7.6 | length 19.5
  Bottom Layer w0.5: J6.7 104.566,51.082 107.205,53.721 U7.6
I2c-SDA-EEPROM: J6.6 U7.5 | length 16.4
  Bottom Layer w0.5: J6.6 107.106,51.082 108.475,52.451 U7.5
I2c-WP-EEPROM: J6.8 U7.7 | length 22.5
  Bottom Layer w0.5: J6.8 102.026,51.082 105.935,54.991 U7.7
IN12vdcPUT01: J13.2 R31.1 | length 6.2
  Bottom Layer w0.5: J13.2 112.475,88.566 112.475,86.65 115.078,84.047 R31.1
IN12vdcPUTGND: C11.2 J13.1 R39.1 U14.2 | length 21.2
  Bottom Layer w0.5: R39.1 114.654,74.533 116.13,76.009 116.805,76.009 117.221,76.425 U14.2 ; C11.2 C11.2@117.541,78.078
  Bottom Layer w1: J13.1 107.061,88.359 107.801,87.618 107.801,87.398 114.554,80.645 R39.1
IN220vacPUT01: J14.2 R19.1 | length 2.7
  Bottom Layer w0.5: 127.381,85.344 J14.2@127.381,88.011
IN220vacPUT1N: C6.2 C7.2 C8.2 C9.2 C10.2 C12.2 J14.1 U9.2 U10.2 U11.2 U12.2 U13.2 U15.2 | length 58.4
  Bottom Layer w0.5: J14.1 124.587,86.614 U13.2 124.587,73.699 124.88,73.406 130.702,73.406 ; C10.2@124.657,77.466 C10.2 ; U12.2 130.556,73.552 130.702,73.406 ; U11.2 136.525,73.406 ; U10.2 142.494,73.406 ; U9.2 148.463,73.406 ; U15.2 154.432,73.699 154.139,73.406 148.463,73.406 ; 130.702,73.406 136.525,73.406 ; 136.525,73.406 142.494,73.406 ; 142.494,73.406 148.463,73.406
IN220vacPUT02: J14.3 R18.1 | length 2.7
  Bottom Layer w0.5: 132.461,85.344 J14.3@132.461,88.011
IN220vacPUT03: J14.4 R17.1 | length 2.7
  Bottom Layer w0.5: 137.541,85.344 J14.4@137.541,88.011
IN220vacPUT04: J14.5 R16.1 | length 2.7
  Bottom Layer w0.5: 142.621,85.344 J14.5@142.621,88.011
IN220vacPUT05: J14.6 R15.1 | length 2.7
  Bottom Layer w0.5: 147.701,85.344 J14.6@147.701,88.011
IN220vacPUT06: J14.7 R32.1 | length 2.7
  Bottom Layer w0.5: 152.781,85.344 J14.7@152.781,88.011
INPUT-flag01: J4.10 R30.2 U13.3 | length 34.6
  Bottom Layer w0.5: R30.2 96.965,68.197 96.965,66.05 J4.10 96.946,65.403 100.183,62.166 119.112,62.166 123.229,66.283 123.229,66.441 124.587,67.799 U13.3
INPUT-flag02: J4.11 R29.2 U12.3 | length 43.5
  Bottom Layer w0.5: R29.2 94.424,68.197 94.424,66.05 J4.11 94.406,65.632 98.626,61.412 119.425,61.412 124.561,66.548 129.305,66.548 130.556,67.799 U12.3
INPUT-flag03: J4.12 R28.2 U11.3 | length 52.6
  Bottom Layer w0.5: R28.2 91.885,68.197 91.885,66.05 J4.12 91.866,65.632 96.84,60.658 119.737,60.658 124.849,65.77 134.376,65.77 136.525,67.919 U11.3
INPUT-flag04: J4.13 R27.2 U10.3 | length 61.8
  Bottom Layer w0.5: R27.2 89.344,68.197 89.344,66.05 J4.13 89.326,65.632 95.054,59.904 120.049,59.904 125.161,65.016 139.711,65.016 142.494,67.799 U10.3
INPUT-flag05: J4.14 R26.2 U9.3 | length 71.1
  Bottom Layer w0.5: R26.2 86.804,68.197 86.804,66.05 J4.14 86.786,65.632 93.268,59.15 120.362,59.15 125.474,64.262 145.161,64.262 148.463,67.564 U9.3
INPUT-flag06: J6.12 R41.2 U15.3 | length 70.4
  Bottom Layer w0.5: J6.12 91.866,51.082 99.18,58.396 120.674,58.396 125.75,63.472 147.586,63.472 R41.2 147.951,63.607 148.324,63.607 148.344,63.627 150.26,63.627 154.432,67.799 U15.3
INPUT-flag07: J4.2 R40.2 U14.3 | length 5.6
  Bottom Layer w0.5: R40.2 114.562,68.969 117.213,68.969 U14.3 117.243,68.939 117.243,66.055 J4.2
nc-Rel0: J11.1 Rel0.4 | length 7
  Bottom Layer w2: Rel0.4 57.808,14.337 59.175,12.971 J11.1@59.175,12.7
nc-Rel1: J10.7 Rel1.4 | length 6.7
  Bottom Layer w2: Rel1.4 74.378,13.456 74.863,12.971 J10.7
nc-Rel2: J10.4 Rel2.4 | length 6.8
  Bottom Layer w2: J10.4 90.103,12.971 90.947,13.815 Rel2.4
nc-Rel3: J10.1 Rel3.4 | length 7.4
  Bottom Layer w2: J10.1 105.534,12.891 105.534,14.094 107.326,15.886 107.326,18.982 Rel3.4
nc-Rel4: J12.7 Rel4.4 | length 7.7
  Bottom Layer w2: J12.7@121.031,12.7 121.031,12.971 121.666,13.606 121.666,15.875 123.895,18.104 123.895,18.982 Rel4.4
nc-Rel5: J12.4 Rel5.4 | length 8.5
  Bottom Layer w2: J12.4@136.271,12.7 136.271,15.113 140.14,18.982 140.465,18.982 Rel5.4
nc-Rel6: J12.1 Rel6.4 | length 8.8
  Bottom Layer w2: J12.1@151.511,12.7 151.511,12.954 157.035,18.478 157.035,18.982 Rel6.4
NetC6_1: C6.1 D7.2 U9.1
NetC7_1: C7.1 D8.2 U10.1
NetC8_1: C8.1 D9.2 U11.1
NetC9_1: C9.1 D10.2 U12.1
NetC10_1: C10.1 D11.2 U13.1
NetC11_1: C11.1 D18.2 U14.1
NetC12_1: C12.1 D19.2 U15.1
NetD5_2: D5.2 R13.2 | length 3.2
  Bottom Layer w1: D5.2@52.205,41.465 R13.2@55.448,41.465
NetD6_1: D6.1 Q1.2 R13.1 Rel0.5 | length 13.1
  Bottom Layer w0.5: Q1.2 57.417,43.675 57.417,41.414 R13.1
  Bottom Layer w1: D6.1@56.752,38.608 57.278,38.082 57.808,37.552 Rel0.5 ; D6.1@57.448,38.252 R13.1@57.448,41.4
NetD7_1: D7.1 R15.2 | length 3.3
  Bottom Layer w0.5: R15.2 149.701,84.629 150.295,84.035 150.353,84.035 150.903,83.485 D7.1
NetD8_1: D8.1 R16.2 | length 2.9
  Bottom Layer w0.5: R16.2 144.621,83.498 D8.1
NetD9_1: D9.1 R17.2 | length 3
  Bottom Layer w0.5: D9.1 138.965,83.485 139.541,84.061 R17.2
NetD10_1: D10.1 R18.2 | length 3.4
  Bottom Layer w0.5: D10.1 133.196,83.485 133.746,84.035 133.867,84.035 134.461,84.629 R18.2
NetD11_1: D11.1 R19.2 | length 4.4
  Bottom Layer w0.5: D11.1 128.524,83.185 129.381,84.042 R19.2
NetD12_2: D12.2 R20.2 | length 3.2
  Bottom Layer w1: D12.2@68.759,41.465 R20.2@72.003,41.465
NetD13_2: D13.2 R21.2 | length 3.2
  Bottom Layer w1: D13.2@85.344,41.465 R21.2@88.588,41.465
NetD14_2: D14.2 R22.2 | length 3.2
  Bottom Layer w1: D14.2@101.906,41.465 R22.2@105.15,41.465
NetD15_1: D15.1 Q2.2 R20.1 Rel1.5 | length 13.1
  Bottom Layer w0.5: R20.1 74.022,41.42 74.022,43.669 Q2.2
  Bottom Layer w1: D15.1@73.322,38.608 74.378,37.552 Rel1.5 ; D15.1@74.003,38.252 R20.1
NetD16_1: D16.1 Q3.2 R21.1 Rel2.5 | length 13.1
  Bottom Layer w0.5: Q3.2 90.563,43.676 90.563,41.424 R21.1@90.588,41.4
  Bottom Layer w1: D16.1@90.003,38.477 91.059,37.421 Rel2.5@91.059,31.242 ; D16.1@90.588,38.252 R21.1@90.588,41.4
NetD17_1: D17.1 Q4.2 R22.1 Rel3.5 | length 13.3
  Bottom Layer w0.5: R22.1 107.169,41.42 107.169,43.669 Q4.2 Q4.2@107.315,43.815
  Bottom Layer w1: D17.1@106.461,38.608 107.517,37.552 Rel3.5 ; D17.1@107.15,38.252 R22.1
NetD18_1: D18.1 R31.2 | length 2.7
  Bottom Layer w0.5: R31.2 D18.1
NetD19_1: D19.1 R32.2 | length 3.7
  Bottom Layer w0.5: R32.2 154.781,85.879 156.322,84.338 156.322,83.735 D19.1
NetD20_2: D20.2 R33.2 | length 3.4
  Bottom Layer w1: D20.2 118.543,41.4 R33.2
NetD21_2: D21.2 R34.2 | length 3.2
  Bottom Layer w1: D21.2@135.053,41.465 R34.2@138.297,41.465
NetD22_2: D22.2 R35.2 | length 3.4
  Bottom Layer w1: D22.2 151.626,41.465 154.87,41.465 R35.2
NetD23_1: D23.1 Q5.2 R33.1 Rel4.5 | length 13.3
  Bottom Layer w0.5: Q5.2 123.698,43.561 123.71,43.549 123.71,41.417 R33.1@123.877,41.25
  Bottom Layer w1: D23.1@123.031,38.608 124.087,37.552 Rel4.5 ; 123.877,38.102 R33.1@123.877,41.25
NetD24_1: D24.1 Q6.2 R34.1 Rel5.5 | length 13.4
  Bottom Layer w0.5: R34.1 140.316,41.42 140.316,43.669 Q6.2
  Bottom Layer w1: D24.1 139.597,38.608 140.656,37.548 Rel5.5 ; D24.1@140.297,38.252 R34.1
NetD25_1: D25.1 Q7.2 R35.1 Rel6.5 | length 12.6
  Bottom Layer w1: Q7.2 156.845,41.525 156.87,41.5 R35.1 156.87,38.252 156.698,38.08 157.226,37.552 Rel6.5
NetGSM1_4: GSM1.4 R1.1 R2.2 | length 77.8
  Bottom Layer w0.5: GSM1.4 17.78,76.327 16.637,75.184 R1.1 16.737,73.524 16.987,73.274 16.987,73.174 17.66,72.501 23.842,72.501 35.113,61.23 R2.2
NetGSM1_9: GSM1.9 J7.1 | length 3.7
  Bottom Layer w1: GSM1.9 J7.1
NetGSM1_10: GSM1.10 J7.2 | length 3.7
  Bottom Layer w1: GSM1.10 J7.2
NetGSM1_11: GSM1.11 J7.3 | length 3.7
  Bottom Layer w1: GSM1.11 J7.3
NetGSM1_12: GSM1.12 J7.4 | length 3.7
  Bottom Layer w1: GSM1.12 J7.4
NetJ2_2: J2.2 R3.1
NetJ2_4: J2.4 R5.1
NetJ2_6: J2.6 R7.1
NetQ1_3: Q1.3 R14.2 | length 2.5
  Bottom Layer w0.5: R14.2@58.547,46.101 58.61,46.038 58.61,43.752 Q1.3
NetQ2_3: Q2.3 R23.2 | length 2.5
  Bottom Layer w0.5: R23.2@75.184,46.101 75.248,46.038 75.248,43.752 Q2.3
NetQ3_3: Q3.3 R24.2 | length 2.5
  Bottom Layer w0.5: R24.2@91.694,46.101 91.757,46.038 91.757,43.752 Q3.3
NetQ4_3: Q4.3 R25.2 | length 2.5
  Bottom Layer w0.5: R25.2@108.331,46.101 108.394,46.038 108.394,43.752 Q4.3
NetQ5_3: Q5.3 R36.2 | length 2.5
  Bottom Layer w0.5: R36.2@124.841,46.101 124.904,46.038 124.904,43.752 Q5.3
NetQ6_3: Q6.3 R37.2 | length 2.5
  Bottom Layer w0.5: R37.2@141.478,46.101 141.541,46.038 141.541,43.752 Q6.3
NetQ7_3: Q7.3 R38.2 | length 2.5
  Bottom Layer w0.5: R38.2@157.988,46.101 158.052,46.038 158.052,43.752 Q7.3
NetR9_2: R9.2 U4.1 | length 8.1
  Bottom Layer w0.5: R9.2@23.749,38.116 U4.1
NetR10_1: R10.1 U2.5 | length 4.2
  Bottom Layer w0.5: U2.5 133.35,52.716 136.033,55.399 R10.1
NetR12_1: R12.1 U6.5 | length 4.2
  Bottom Layer w0.5: U6.5 133.35,60.949 136.033,58.266 R12.1
no-Rel0: J11.3 Rel0.3 | length 8.7
  Bottom Layer w2: Rel0.3 46,18.982 47.312,18.982 49.212,17.082 49.212,12.891 J11.3
no-Rel1: J10.9 Rel1.3 | length 7.4
  Bottom Layer w2: Rel1.3 62.378,18.902 62.992,18.288 62.992,14.682 64.703,12.971 J10.9
no-Rel2: J10.6 Rel2.3 | length 6.9
  Bottom Layer w2: Rel2.3 78.947,13.966 79.943,12.971 J10.6
no-Rel3: J10.3 Rel3.3 | length 6.6
  Bottom Layer w2: J10.3 95.183,12.971 95.517,13.305 Rel3.3
no-Rel4: J12.9 Rel4.3 | length 7
  Bottom Layer w2: J12.9@110.871,12.7 110.871,12.971 111.506,13.606 111.506,18.322 112.087,18.902 Rel4.3
no-Rel5: J12.6 Rel5.3 | length 7.5
  Bottom Layer w2: J12.6@126.111,12.7 126.111,12.971 128.016,14.876 128.016,18.262 128.656,18.902 Rel5.3
no-Rel6: J12.3 Rel6.3 | length 8.2
  Bottom Layer w2: J12.3@141.351,12.7 141.161,12.89 141.161,13.162 141.851,13.852 141.851,14.216 145.035,17.4 145.035,18.982 Rel6.3
OUTPUT00: J6.20 R14.1 | length 25.1
  Bottom Layer w0.5: R14.1@48.347,46.101 52.928,50.682 J6.20
OUTPUT01: J6.19 R23.1 | length 11.2
  Bottom Layer w0.5: R23.1@64.984,46.101 69.905,46.101 74.086,50.282 J6.19
OUTPUT02: J6.18 R24.1 | length 7
  Bottom Layer w0.5: J6.18 76.626,50.282 80.52,46.388 81.207,46.388 R24.1@81.494,46.101
OUTPUT03: J6.17 R25.1 | length 21.9
  Bottom Layer w0.5: J6.17 79.166,50.282 81.442,48.006 87.582,48.006 88.471,48.895 94.234,48.895 96.906,46.223 97.882,46.223 R25.1
OUTPUT04: J6.11 R36.1 | length 22.2
  Bottom Layer w0.5: J6.11 94.406,50.526 95.319,49.613 96.22,48.712 109.784,48.712 112.125,46.371 114.371,46.371 R36.1@114.641,46.101
OUTPUT05: J6.5 R37.1 | length 24.7
  Bottom Layer w0.5: J6.5 109.646,50.526 112.602,47.57 121.23,47.57 122.543,48.883 128.496,48.883 R37.1@131.278,46.101
OUTPUT06: J6.4 R38.1 | length 38.7
  Bottom Layer w0.5: J6.4 112.186,50.526 114.388,48.324 120.918,48.324 122.231,49.637 130.948,49.637 131.817,48.768 145.121,48.768 R38.1@147.788,46.101
Power-flag: J6.13 R11.1 U4.4 | length 69.4
  Bottom Layer w0.5: U4.4@23.876,53.848 23.876,55.313 24.169,55.606 84.983,55.606 89.326,51.263 J6.13
PR12V: C1.1 D2.1 DB1.1 J5.3 J5.4 R9.1 | length 56.7
  Bottom Layer w1: J5.4 D2.1@15.489,29.464 ; D2.1@15.875,29.028 16.175,28.728 16.175,28.524 17.196,28.524 18.415,27.305 18.415,21.922 19.001,21.336 23.798,21.336 24.384,21.922 24.384,30.139 26.757,32.512 C1.1 ; R9.1 25.765,33.504 29.464,29.805 29.464,21.317 27.265,19.118 DB1.1
  Bottom Layer w2: J5.3 12.7,28.575 13.149,29.024 D2.1@15.675,29.024
RESET: J4.17
RF-R1: J6.9 U2.4 | length 47
  Bottom Layer w0.5: J6.9 99.486,51.082 105.292,56.888 121.299,56.888 123.212,58.801 130.009,58.801 132.08,56.73 132.08,51.718 132.851,50.947 134.686,50.947 135.89,52.151 U2.4
RF-R2: J6.10 U6.4 | length 45.4
  Bottom Layer w0.5: J6.10 96.946,51.082 103.506,57.642 120.986,57.642 126.062,62.718 134.686,62.718 135.596,61.808 135.976,61.808 136.017,61.849 136.017,61.341 U6.4
RS485-A: J9.3 U8.6 | length 28.8
  Bottom Layer w0.5: J9.3 34.443,12.7 34.443,13.507 36.068,15.132 36.068,38.989 35.179,39.878 U8.6
RS485-B: J9.2 U8.7 | length 28.7
  Bottom Layer w0.5: U8.7 37.719,39.751 36.957,38.989 36.957,15.104 39.243,12.818 J9.2
UART-RX-GSM: GSM1.5 J4.16 | length 68.9
  Bottom Layer w0.5: GSM1.5 23.622,73.787 35.306,62.103 78.105,62.103 81.706,65.704 J4.16
UART-RX-RS485: J6.14 J8.1 U8.1 | length 53.5
  Bottom Layer w0.5: U8.1 40.259,48.152 43.478,51.371 43.78,51.371 44.196,51.787 J8.1 45.347,53.094 81.907,53.094 83.042,51.959 83.042,49.458 83.605,48.895 85.852,48.895 86.614,49.657 86.614,50.51 J6.14
UART-RX-WIFI: J4.7 U1.8 | length 63.9
  Bottom Layer w0.5: U1.8 52.349,65.511 54.123,63.738 65.008,63.738 73.295,72.025 99.316,72.025 100.78,70.561 100.78,65.175 101.527,64.428 103.362,64.428 104.566,65.632 J4.7
UART-TX-GSM: J4.15 R2.1 | length 3.2
  Bottom Layer w0.5: J4.15@84.246,65.632 J4.15 84.287,65.991 84.287,63.271 R2.1
UART-TX-RS485: J6.15 J8.2 U8.4 | length 57.2
  Bottom Layer w0.5: U8.4 32.639,48.152 34.335,49.847 39.96,49.847 41.656,51.543 J8.2 ; J8.2@41.656,52.346 41.656,53.555 41.949,53.848 82.423,53.848 84.192,52.079 84.192,50.736 J6.15
UART-TX-WIFI: J4.8 U1.1 | length 49.3
  Bottom Layer w0.5: U1.1 68.555,68.351 72.983,72.779 99.629,72.779 101.854,70.554 101.854,66.204 J4.8
UART-TXEN-RS485: J6.16 U8.2 U8.3 | length 50.9
  Bottom Layer w0.5: U8.3 U8.2 37.719,47.352 38.923,46.148 41.703,46.148 47.895,52.34 80.448,52.34 81.706,51.082 J6.16
VBAT: J3.1 J4.1 | length 16.9
  Bottom Layer w0.5: J3.1 109.503,72.136 109.919,71.72 109.919,71.564 113.411,68.072 113.411,65.024 114.427,64.008 118.364,64.008 119.806,65.45 J4.1
pads on no net: GSM1.3 GSM1.7 GSM1.8 J4.3 J4.4 J6.3 U1.3 U1.4 U1.5 U2.1 U6.1 U7.1 U7.2 U7.3
copper on no net:
  other v2: 17.351,117.587 34.851,117.587 17.351,157.587 34.851,157.587

## Polygon pours and split planes (outlines as drawn)
GND on Bottom Layer "GND_L02_P001" (solid, remove dead copper, pour order 1): 10,10 10,82 65,82 65,91.744 104.554,91.744 104.554,74.328 111.031,67.851 160.033,67.851 160.053,39.779 43.033,39.779 43.033,10
no net on Bottom Layer "NONET_L02_P000" (solid, remove dead copper, pour order 0): 73.246,193.515 73.246,265.515 128.246,265.515 128.246,275.259 167.8,275.259 167.8,257.843 174.277,251.366 223.279,251.366 223.299,223.294 106.279,223.294 106.279,193.515

## Silkscreen, mask and mechanical layers (free items; w line width, h text height)
Top Overlay:
  lines w0.1: 10,9.769 10,8.669 160,8.669 ; 160,8.694 160,9.794
  lines w0.24: 0,10 0,0 10,0 ; 9.959,89.729 13.959,89.729 ; 9.967,11.744 13.967,11.744 13.967,9.744 ; 13.959,89.719 13.959,91.719 ; 63.246,193.515 63.246,183.515 73.246,183.515 ; 155.959,91.729 155.959,89.729 159.959,89.729 ; 155.967,9.754 155.967,11.754 ; 155.967,11.744 159.967,11.744
  lines w0.254: 14.27,21 14.937,19 ; 14.27,60 14.937,62 ; 14.683,19 15.191,19 ; 14.683,62 15.191,62 ; 14.868,157.35 15.367,158.877 ; 14.937,18.746 14.937,19.254 ; 14.937,33.929 14.937,19 ; 14.937,47.071 14.937,62 ; 15.103,117.345 15.619,115.824 ; 15.113,158.876 15.621,158.878 ; 15.365,115.823 15.873,115.825 ; 15.446,145.374 15.367,158.877 ; 15.54,129.327 15.619,115.824 ; 15.604,21 14.937,19 ; 15.604,60 14.937,62 ; 15.622,115.316 15.62,115.824 ; 15.884,157.356 15.367,158.877 ; 16.119,117.351 15.619,115.824 ; 16.937,18.333 14.937,19 ; 16.937,19.667 14.937,19 ; 17.142,116.087 15.621,115.57 ; 17.148,115.071 15.621,115.57 ; 18.646,115.587 15.621,115.57 ; 19.033,19 14.937,19 ; 31.841,19 35.937,19 ; 33.937,18.333 35.937,19 ; 33.937,19.667 35.937,19 ; 34.694,115.68 37.719,115.697 ; 35.937,18.746 35.937,19.254 ; 36.192,116.196 37.719,115.697 ; 36.198,115.18 37.719,115.697 ; 37.718,115.951 37.72,115.443
  text "43.054 (mm)" at 14.534,145.115 h1.52 r270.34
  text "22.098 (mm)" at 18.905,114.675 h1.52 r0.33
  text "43 (mm)" at 16.089,34.183 h2 r90
  text "21 (mm)" at 19.287,17.848 h2
Mechanical 1:
  lines w0.24: 10,9.744 10,91.744 160,91.744 160,9.744
  lines w0.254: 10,9.744 160,9.744 ; 10,103.124 10,103.632 ; 12,102.711 10,103.378 ; 12,104.045 10,103.378 ; 77.596,103.378 10,103.378 ; 92.404,103.378 160,103.378 ; 158,102.711 160,103.378 ; 158,104.045 160,103.378 ; 160,103.124 160,103.632 ; 164.253,11.779 164.92,9.779 ; 164.253,89.779 164.92,91.779 ; 164.666,9.779 165.174,9.779 ; 164.666,91.779 165.174,91.779 ; 164.92,44.208 164.92,9.779 ; 164.92,57.35 164.92,91.779 ; 165.587,11.779 164.92,9.779 ; 165.587,89.779 164.92,91.779
  text "150 (mm)" at 77.85,102.226 h2
  text "82 (mm)" at 166.072,44.462 h2 r90

## Text inside footprints (layer, text, board x,y; h text height)
U2: Top Overlay "VDD" at 139.62,54.951 h0.5 r180; Top Overlay "D" at 135.32,54.851 h0.5 r270; Top Overlay "D" at 132.92,54.851 h0.5 r270; Top Overlay "GND" at 132.12,54.951 h0.5 r180; Top Overlay "ANT" at 159.02,54.951 h0.5 r180
U6: Top Overlay "ANT" at 159.02,63.714 h0.5 r180; Top Overlay "GND" at 132.12,63.714 h0.5 r180; Top Overlay "D" at 132.92,63.614 h0.5 r270; Top Overlay "D" at 135.32,63.614 h0.5 r270; Top Overlay "VDD" at 139.62,63.714 h0.5 r180